# Altium PCB FLATSAT BCR.PcbDoc (part 2 of 3)
Units mm, origin at the board's own origin, x right, y up, seen from the top; angles counter-clockwise.
Board outline 180 x 90 mm, 4 copper layers (Top Layer, Internal Plane 1, Internal Plane 2, Bottom Layer); 220 components, 140 nets, 843 pads, 517 vias.
Unrouted connection lines stored in the file: 2.
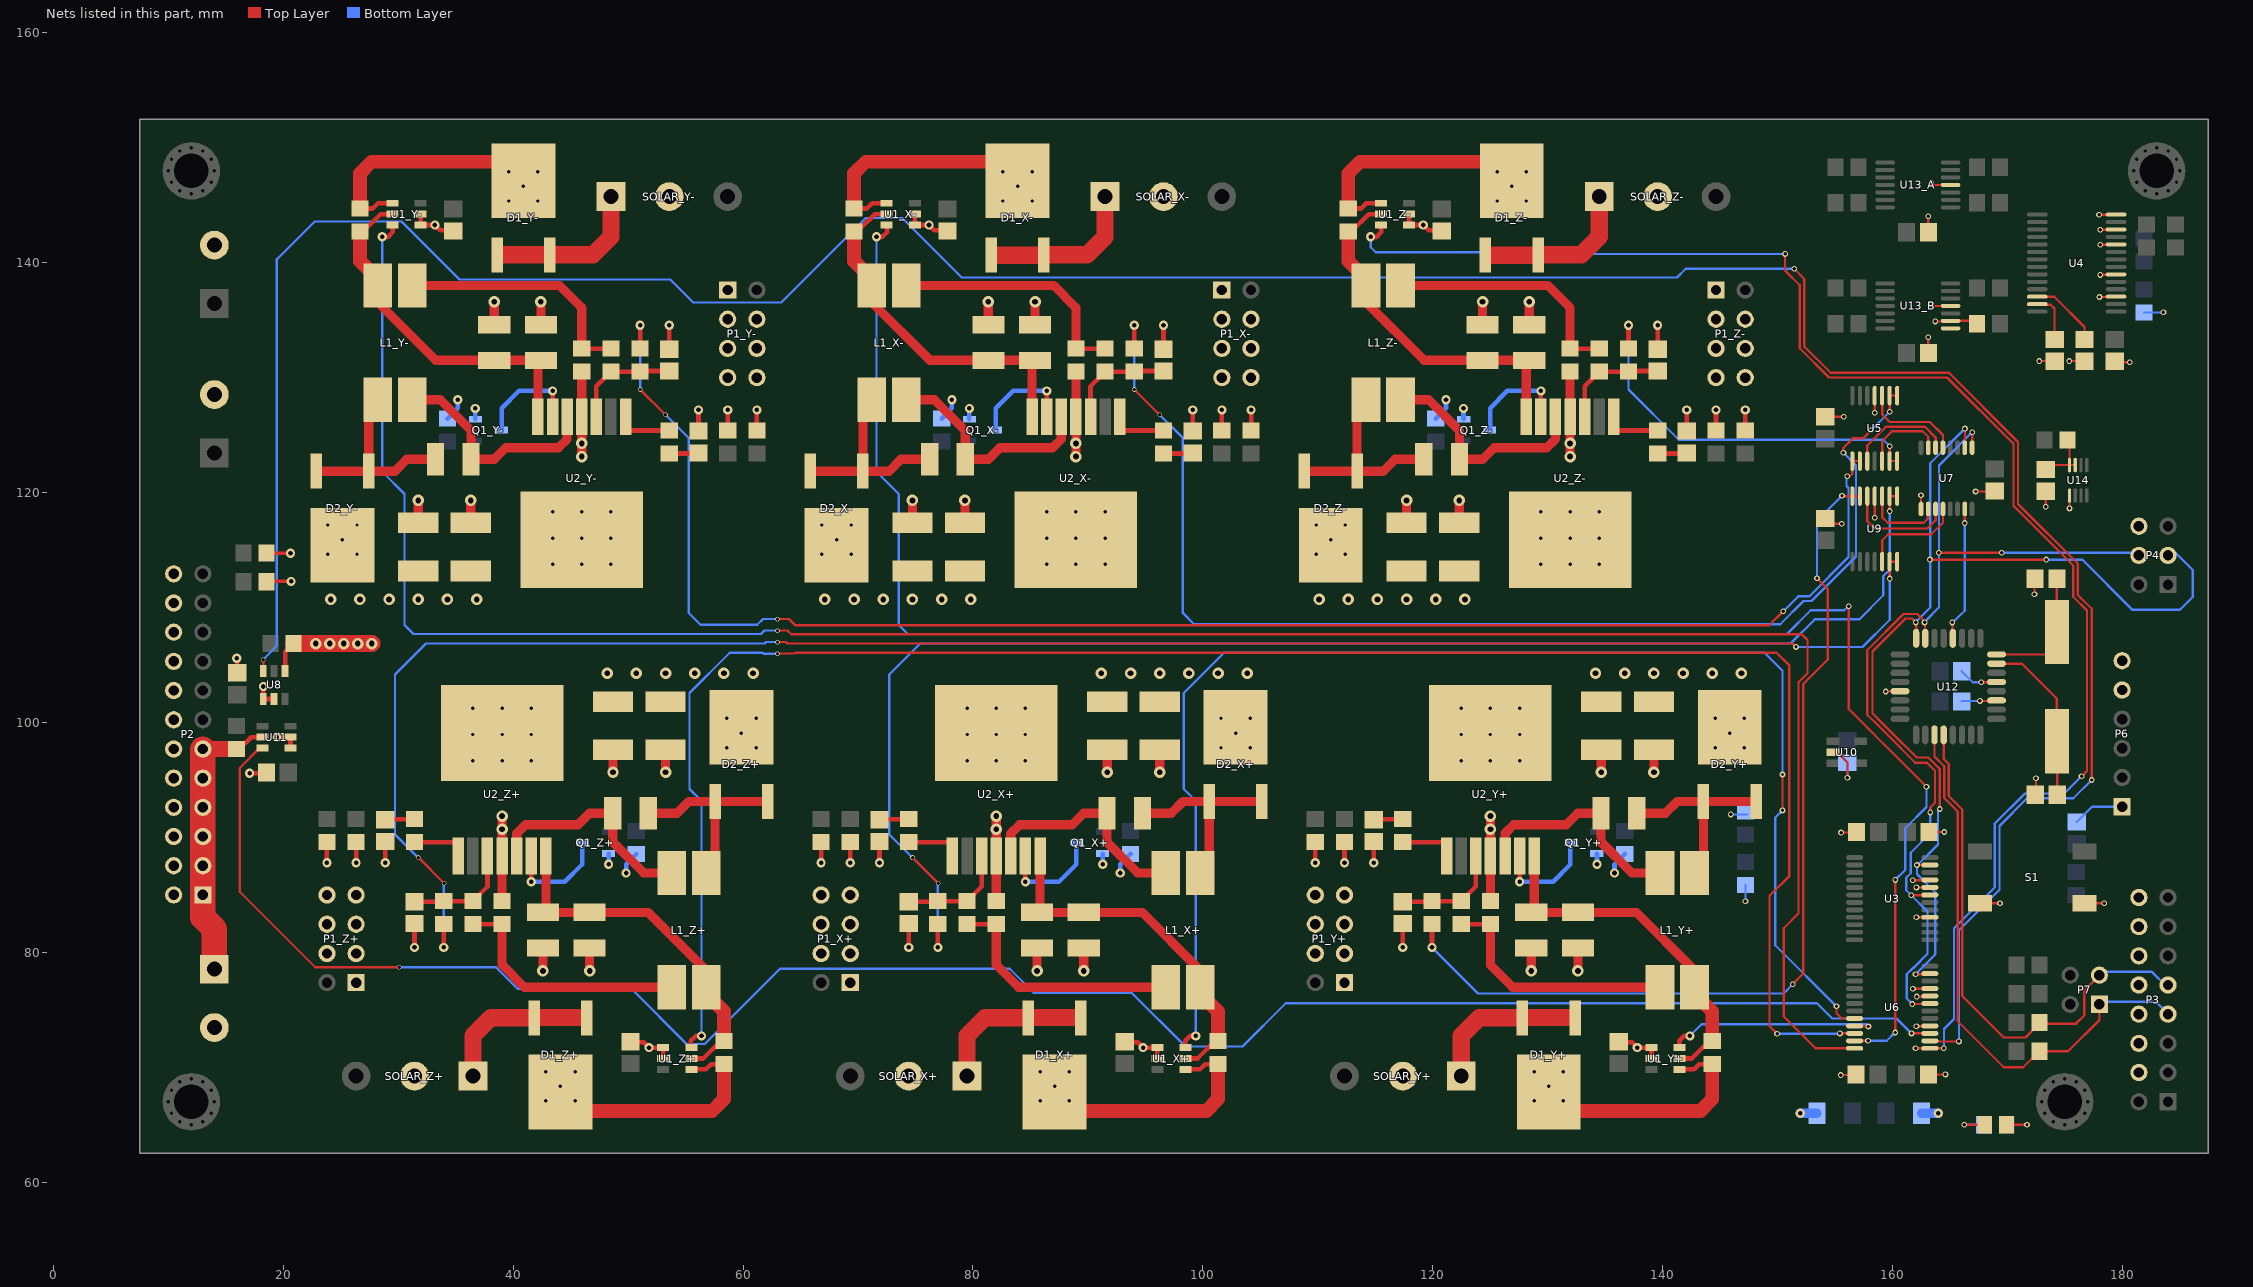
[diagram p4: the nets of this part, all layers, seen from the top]

## Via types
v1: diameter 0.5, hole 0.3, Top Layer to Bottom Layer, tented both sides, 205 vias
v2: diameter 0.5, hole 0.3, Top Layer to Bottom Layer, tented bottom, 114 vias
v3: diameter 0.8, hole 0.4, Top Layer to Bottom Layer, tented both sides, 103 vias
v4: diameter 1, hole 0.5, Top Layer to Bottom Layer, tented both sides, 77 vias
v5: diameter 0.4, hole 0.3, Top Layer to Bottom Layer, tented both sides, 18 vias

## Nets (pads, with @x,y where several pads share a name; then routed paths per layer and width w, separated by ;. In a path a pad name is that pad's centre, name@x,y a point inside that pad or via, vN(x,y) a via of type N, cw(c..) or ccw(c..) an arc to the next point about the centre after c; other vN are vias at no path point) (continued)
BCR_SCL: P3.7 P7.1 R19.2 U12.27 | length 49.5
  Top Layer w0.2: U12.27@163.675,98.925 163.675,97.05 164.525,96.2 164.525,93.434 165.696,92.263 165.696,74.004 169.7,70 171.4,70 R19.2@172.8,71.4 175.3,71.4 178.025,74.125 P7.1@178.025,75.475
  Bottom Layer w0.2: P7.1@178.025,75.475 178.25,75.7 182.945,75.7 P3.7@184.125,74.52
BCR_SDA: P3.9 P7.3 R20.2 U12.28 | length 47.1
  Top Layer w0.2: U12.28@164.475,98.925 164.475,96.834 164.925,96.384 164.925,93.6 166.1,92.425 166.1,76.2 169.7,72.6 171.6,72.6 172.8,73.8 176,73.8 176.7,74.5 176.7,76.69 P7.3@178.025,78.015
  Bottom Layer w0.2: P7.3@178.025,78.015 178.31,78.3 182.6,78.3 183.84,77.06 P3.9@184.125,77.06
DAC_S\S\: U7.7 U12.12 | length 11.8
  Top Layer w0.2: U12.12@165.248,107.35 v1@165.248,108.7 ; U7.7@166.275,118.546 U7.7@166.3,118.571 ; v1(166.3,117.35) U7.7@166.3,118.571 ; U7.7@166.3,118.7 U7.7@166.3,118.571 ; U7.7@166.312,118.583 U7.7@166.3,118.571
  Bottom Layer w0.2: v1@165.248,108.7 166.3,109.725 v1(166.3,117.35)
  other v1: 165.227,108.712
DTR: C24.1 P6.1 | length 4.5
  Bottom Layer w0.2: C24.1@176.05,91.35 177.375,92.675 P6.1@180,92.675
GND: BAT-TEMP.2 BAT.2 C1_X+.2 C1_X-.2 C1_Y+.2 C1_Y-.2 C1_Z+.2 C1_Z-.2 C2_X+.2 C2_X-.2 C2_Y+.2 C2_Y-.2 C2_Z+.2 C2_Z-.2 C4_X+.2 C4_X-.2 C4_Y+.2 C4_Y-.2 C4_Z+.2 C4_Z-.2 C5_X+.2 C5_X-.2 C5_Y+.2 C5_Y-.2 C5_Z+.2 C5_Z-.2 C6_X+.2 C6_X-.2 C6_Y+.2 C6_Y-.2 C6_Z+.2 C6_Z-.2 C7_X+.2 C7_X-.2 C7_Y+.2 C7_Y-.2 C7_Z+.2 C7_Z-.2 C8_X+.1 C8_X-.1 C8_Y+.1 C8_Y-.1 C8_Z+.1 C8_Z-.1 C9.1 C10.1 C11.1 C12.1 C13.2 C14.1 C15.1 C16.1 C17.1 C18.1 C19.2 C20.2 C21.1 C22.1 C23.1 C25.1 C26.2 C27_A.1 C27_B.1 C28.1 C29.1 C30.1 D3.2 LOAD.2 P1_X+.4 P1_X+.6 P1_X+.8 P1_X-.4 P1_X-.6 P1_X-.8 P1_Y+.4 P1_Y+.6 P1_Y+.8 P1_Y-.4 P1_Y-.6 P1_Y-.8 P1_Z+.4 P1_Z+.6 P1_Z+.8 P1_Z-.4 P1_Z-.6 P1_Z-.8 P2.2 P2.4 P2.6 P2.8 P2.10 P2.12 P2.14 P2.16 P2.18 P2.20 P2.22 P2.24 P3.4 P3.6 P3.8 P3.10 P3.12 P3.14 P3.16 P4.6 P6.5 P6.6 Q1_X+.2 Q1_X-.2 Q1_Y+.2 Q1_Y-.2 Q1_Z+.2 Q1_Z-.2 R3_X+.2 R3_X-.2 R3_Y+.2 R3_Y-.2 R3_Z+.2 R3_Z-.2 R6_X+.1 R6_X-.1 R6_Y+.1 R6_Y-.1 R6_Z+.1 R6_Z-.1 R8_X+.2 R8_X-.2 R8_Y+.2 R8_Y-.2 R8_Z+.2 R8_Z-.2 R10.2 R13.2 R17.1 S1.1 SOLAR_X+.2 SOLAR_X-.2 SOLAR_Y+.2 SOLAR_Y-.2 SOLAR_Z+.2 SOLAR_Z-.2 U1_X+.1 U1_X+.2 U1_X-.1 U1_X-.2 U1_Y+.1 U1_Y+.2 U1_Y-.1 U1_Y-.2 U1_Z+.1 U1_Z+.2 U1_Z-.1 U1_Z-.2 U2_X+.4 U2_X-.4 U2_Y+.4 U2_Y-.4 U2_Z+.4 U2_Z-.4 U3.4 U3.8 U3.9 U4.3 U4.6 U4.10 U4.12 U4.14 U5.11 U6.4 U6.8 U6.9 U7.1 U8.1 U8.2 U9.11 U10.2 U11.1 U11.2 U12.3 U12.5 U12.21 U13_A.11 U13_B.11 U14.1 | length 245.2
  Top Layer w0.2: C12.1@154.175,117.75 154.625,117.3 v1(155.6,117.3) ; C18.1@154.175,126.6 v1(155.775,126.6) ; U10.2@154.85,97.425 155.199,97.425 156.1,96.524 v1(156.1,95.2) ; v1(155.525,69.325) C16.1@156.75,69.325 ; v1(155.55,90.425) C11.1@156.775,90.425 ; v1(158.475,117.825) U9.11@158.475,119.7 ; v1@158.475,126.975 U5.11@158.475,128.45 ; v1(159.425,102.7) U12.21@161.15,102.7 ; v1(161.775,86.275) U3.9@163,86.275 ; v1(161.8,76.825) U6.9@163.025,76.825 ; v1(162.1,73.575) U6.4@163.325,73.575 ; v1(162.1,83.05) U3.4@163.325,83.05 ; v1(162.1,85.65) U3.8@163.325,85.65 ; v1(162.125,76.15) U6.8@163.35,76.15 ; U7.1@162.5,118.475 v1(162.5,119.775) ; C27_B.1@163.125,132.175 v1(163.125,133.525) ; C27_A.1@163.125,142.7 v1(163.125,144.05) ; C9.1@163.3,90.475 v1(164.525,90.475) ; C15.1@163.4,69.375 v1(164.625,69.375) ; v1(163.4,136.425) 163.575,136.25 U13_B.11@165.1,136.25 ; v1(163.4,146.95) 163.575,146.775 U13_A.11@165.1,146.775 ; v1(167.25,120.1) C17.1@168.975,120.1 ; v1(167.625,101.875) U12.3@169.35,101.875 ; S1.1@167.65,84.275 v1(169.375,84.275) ; v1(167.75,103.5) U12.5@169.475,103.5 ; D3.2@170,65 v1(171.725,65) ; v1(172.375,111.15) C23.1@172.375,112.5 ; C22.1@172.5,93.8 v1(172.5,95.15) ; v1(172.8,131.45) C13.2@174.15,131.45 ; v1(173.35,118.775) C28.1@173.35,120.125 C28.1@173.725,119.75 ; v1(175.4,131.45) C14.1@176.75,131.45 ; v1(175.425,118.625) U14.1@175.425,119.975 ; S1.1@176.725,84.275 v1(178.45,84.275) ; v1(178,144.175) U4.14@179.35,144.175 ; v1(178.025,137.025) U4.3@179.375,137.025 ; v1(178.1,138.95) U4.6@179.45,138.95 ; v1(178.1,141.575) U4.10@179.45,141.575 ; v1(178.1,142.875) U4.12@179.45,142.875 ; C10.1@179.325,131.35 v1(180.675,131.35)
  Top Layer w0.3: R17.1@18.292,112.275 v3(20.675,112.275)
  Top Layer w0.4: v3@16,105.672 16,104.325 C19.2@16.191,104.325 ; v3(17.066,95.588) C20.2@18.299,95.588 ; U8.1@18.25,102.266 U8.1@18.25,102.05 U8.1@18.263,102.05 ; U8.1@18.263,101.901 U8.1@18.263,102.05 ; v3(18.263,103.134) U8.1@18.263,102.05 ; U8.2@19.2,102.05 U8.1@18.263,102.05 ; v3(19.441,98.713) U11.2@20.625,98.713 ; U11.1@20.625,97.775 U11.2@20.625,98.713 ; U11.2@20.625,98.725 U11.2@20.625,98.713 ; U11.2@20.674,98.713 U11.2@20.625,98.713 ; v3(23.794,87.797) R3_Z+.2@23.794,89.591 ; v3(28.874,87.797) C5_Z+.2@28.874,89.641 ; v3(31.414,80.431) C8_Z+.1@31.414,82.513 ; U1_Y-.2@31.951,144.237 U1_Y-.1@31.951,143.287 v3(33.184,143.287) 33.647,142.824 34.745,142.824 C4_Y-.2@34.79,142.779 ; C4_Z+.2@50.21,72.221 50.255,72.176 51.353,72.176 v3(51.816,71.713) U1_Z+.1@53.049,71.713 U1_Z+.2@53.049,70.763 ; C8_Y-.1@53.586,132.487 v3(53.586,134.569) ; C5_Y-.2@56.126,125.359 v3(56.126,127.203) ; R3_Y-.2@61.206,125.409 v3(61.206,127.203) ; v3(66.794,87.797) R3_X+.2@66.794,89.591 ; v3(71.874,87.797) C5_X+.2@71.874,89.641 ; v3(74.414,80.431) C8_X+.1@74.414,82.513 ; U1_X-.2@74.951,144.237 U1_X-.1@74.951,143.287 v3(76.184,143.287) 76.647,142.824 77.745,142.824 C4_X-.2@77.79,142.779 ; C4_X+.2@93.21,72.221 93.255,72.176 94.353,72.176 v3(94.816,71.713) U1_X+.1@96.049,71.713 U1_X+.2@96.049,70.763 ; C8_X-.1@96.586,132.487 v3(96.586,134.569) ; C5_X-.2@99.126,125.359 v3(99.126,127.203) ; R3_X-.2@104.206,125.409 v3(104.206,127.203) ; v3(109.794,87.797) R3_Y+.2@109.794,89.591 ; v3(114.874,87.797) C5_Y+.2@114.874,89.641 ; v3(117.414,80.431) C8_Y+.1@117.414,82.513 ; U1_Z-.2@117.951,144.237 U1_Z-.1@117.951,143.287 v3(119.184,143.287) 119.647,142.824 120.745,142.824 C4_Z-.2@120.79,142.779 ; C4_Y+.2@136.21,72.221 136.255,72.176 137.353,72.176 v3(137.816,71.713) U1_Y+.1@139.049,71.713 U1_Y+.2@139.049,70.763 ; C8_Z-.1@139.586,132.487 v3(139.586,134.569) ; C5_Z-.2@142.126,125.359 v3(142.126,127.203) ; R3_Z-.2@147.206,125.409 v3(147.206,127.203)
  Top Layer w0.8: C7_Y-.2@31.742,117.381 v4(31.742,119.329) ; C6_Y-.2@36.314,117.381 v4(36.314,119.329) ; C2_Y-.2@38.346,134.669 v4(38.346,136.617) ; R6_Z+.1@39.034,84.463 v4@39.034,91.734 ; C1_Y-.2@42.41,134.669 v4(42.41,136.617) ; v4(42.59,78.383) C1_Z+.2@42.59,80.331 ; v4@45.966,123.266 R6_Y-.1@45.966,130.537 ; v4(46.654,78.383) C2_Z+.2@46.654,80.331 ; v4(48.686,95.671) C6_Z+.2@48.686,97.619 ; v4(53.258,95.671) C7_Z+.2@53.258,97.619 ; C7_X-.2@74.742,117.381 v4(74.742,119.329) ; C6_X-.2@79.314,117.381 v4(79.314,119.329) ; C2_X-.2@81.346,134.669 v4(81.346,136.617) ; R6_X+.1@82.034,84.463 v4@82.034,91.734 ; C1_X-.2@85.41,134.669 v4(85.41,136.617) ; v4(85.59,78.383) C1_X+.2@85.59,80.331 ; v4@88.966,123.266 R6_X-.1@88.966,130.537 ; v4(89.654,78.383) C2_X+.2@89.654,80.331 ; v4(91.686,95.671) C6_X+.2@91.686,97.619 ; v4(96.258,95.671) C7_X+.2@96.258,97.619 ; C7_Z-.2@117.742,117.381 v4(117.742,119.329) ; C6_Z-.2@122.314,117.381 v4(122.314,119.329) ; C2_Z-.2@124.346,134.669 v4(124.346,136.617) ; R6_Y+.1@125.034,84.463 v4@125.034,91.734 ; C1_Z-.2@128.41,134.669 v4(128.41,136.617) ; v4(128.59,78.383) C1_Y+.2@128.59,80.331 ; v4@131.966,123.266 R6_Z-.1@131.966,130.537 ; v4(132.654,78.383) C2_Y+.2@132.654,80.331 ; v4(134.686,95.671) C6_Y+.2@134.686,97.619 ; v4(139.258,95.671) C7_Y+.2@139.258,97.619
  Bottom Layer w0.2: v1(147.225,84.45) R13.2@147.225,85.875 ; v1(156.1,95.2) C21.1@156.1,96.525 ; C26.2@166.05,101.825 166.1,101.875 v1(167.625,101.875) ; C25.1@166.05,104.45 167,103.5 v1(167.75,103.5) ; R10.2@181.9,135.675 183.575,135.675 v1(183.6,135.7)
  Bottom Layer w0.4: R8_Y-.2@34.282,126.441 35.171,127.33 v3(35.171,128.092) ; Q1_Y-.2@36.695,126.409 v3(36.695,127.33) ; v3(48.305,87.67) Q1_Z+.2@48.305,88.591 ; v3(49.829,86.908) 49.829,87.67 R8_Z+.2@50.718,88.559 ; R8_X-.2@77.282,126.441 78.171,127.33 v3(78.171,128.092) ; Q1_X-.2@79.695,126.409 v3(79.695,127.33) ; v3(91.305,87.67) Q1_X+.2@91.305,88.591 ; v3(92.829,86.908) 92.829,87.67 R8_X+.2@93.718,88.559 ; R8_Z-.2@120.282,126.441 121.171,127.33 v3(121.171,128.092) ; Q1_Z-.2@122.695,126.409 v3(122.695,127.33) ; v3(134.305,87.67) Q1_Y+.2@134.305,88.591 ; v3(135.829,86.908) 135.829,87.67 R8_Y+.2@136.718,88.559
  Bottom Layer w0.8: v3(152,66) C30.1@153.45,66 ; C29.1@162.55,66 v3(164,66)
  other v1: 158.475,126.95
  other v2: 36.494,96.671 39.034,96.671 41.574,96.671 79.494,96.671 82.034,96.671 84.574,96.671 122.494,96.671 125.034,96.671 127.574,96.671 36.494,98.957 39.034,98.957 41.574,98.957 79.494,98.957 82.034,98.957 84.574,98.957 122.494,98.957 125.034,98.957 127.574,98.957 36.494,101.243 39.034,101.243 41.574,101.243 79.494,101.243 82.034,101.243 84.574,101.243 122.494,101.243 125.034,101.243 127.574,101.243 43.426,113.757 45.966,113.757 48.506,113.757 86.426,113.757 88.966,113.757 91.506,113.757 129.426,113.757 131.966,113.757 134.506,113.757 43.426,116.043 45.966,116.043 48.506,116.043 86.426,116.043 88.966,116.043 91.506,116.043 129.426,116.043 131.966,116.043 134.506,116.043 43.426,118.329 45.966,118.329 48.506,118.329 86.426,118.329 88.966,118.329 91.506,118.329 129.426,118.329 131.966,118.329 134.506,118.329
  other v3: 15.95,105.6
  other v4: 39.034,90.718 82.034,90.718 125.034,90.718 39.034,91.861 82.034,91.861 125.034,91.861 45.966,123.139 88.966,123.139 131.966,123.139 45.966,124.282 88.966,124.282 131.966,124.282
I_SET_CV_X+: R7_X+.2 U9.8 U9.9 | length 126.5
  Top Layer w0.2: v5(74.75,88.25) v5(77,86) ; v1(159.775,118.4) U9.9@159.775,119.7 U9.8@160.425,119.7
  Top Layer w0.4: v3(76.954,80.431) R7_X+.2@76.954,82.463
  Bottom Layer w0.2: v5(74.75,88.25) 74.725,88.25 72.725,90.25 72.725,104.175 75.425,106.875 151.147,106.875 153.247,108.975 157.125,108.975 159.225,111.075 159.225,112.753 159.547,113.075 159.6,113.075 159.775,113.25 v1(159.775,118.4) ; v3(76.954,80.431) v5@76.954,86.021
I_SET_CV_X-: R7_X-.2 U5.8 U5.9 | length 107.8
  Top Layer w0.2: v5(94.046,128.979) v5(96.25,126.775) ; v1@155.737,123.488 155.737,123.887 156.575,124.725 157.45,124.725 v1(158.15,125.425) ; v1(159.775,127.05) U5.9@159.775,128.45 U5.8@160.425,128.45
  Top Layer w0.4: R7_X-.2@94.046,132.537 v3(94.046,134.569)
  Bottom Layer w0.2: v5(94.046,128.979) v3(94.046,134.569) ; v5(96.25,126.775) 98.275,124.75 98.275,109.525 99.25,108.55 150.259,108.55 152.284,110.575 152.975,110.575 156.85,114.45 156.85,122.375 v1(155.75,123.475) ; v1@155.65,123.375 v1@155.875,123.375 ; v1(158.15,125.425) v1(159.775,127.05)
I_SET_CV_Y+: R7_Y+.2 U9.13 U9.14 | length 82
  Top Layer w0.2: v1@151.337,77.237 152.25,78.15 152.25,103.347 154.4,105.497 154.4,111.6 v1(153.45,112.55) ; v1(155.625,119.725) 155.65,119.7 U9.14@156.525,119.7 U9.13@157.175,119.7
  Top Layer w0.4: v3(119.954,80.431) R7_Y+.2@119.954,82.463
  Bottom Layer w0.2: v3(119.954,80.431) 123.96,76.425 150.55,76.425 v1(151.35,77.225) ; v1(153.45,112.55) 153.45,117.55 v1(155.625,119.725)
I_SET_CV_Y-: R7_Y-.2 U5.1 U5.2 | length 142.4
  Top Layer w0.2: v5(51.046,128.979) v5(53.25,126.775) ; v5(63,109) 64.009,109 64.534,108.475 149.3,108.475 v1@150.487,109.662 ; v1(156.075,121.425) 156.3,121.425 156.525,121.65 U5.1@156.525,122.75 U5.2@157.175,122.75
  Top Layer w0.4: R7_Y-.2@51.046,132.537 v3(51.046,134.569)
  Bottom Layer w0.2: v5(51.046,128.979) v3(51.046,134.569) ; v5(53.25,126.775) 55.275,124.75 55.275,109.525 56.3,108.5 61.241,108.5 61.741,109 v5(63,109) ; v1(150.525,109.675) 151.825,110.975 152.775,110.975 156.2,114.4 156.2,120.4 156.025,120.575 156.025,121.375 v1(156.075,121.425)
I_SET_CV_Z+: R7_Z+.2 U9.6 U9.7 | length 165.5
  Top Layer w0.2: v5(31.75,88.25) v5(34,86) ; v5(63,107) 63.747,107 63.872,106.875 151.325,106.875 v1(151.625,106.575) ; v1(159.775,112.525) U9.6@159.775,113.875 ; U9.6@159.775,114 U9.7@160.425,114
  Top Layer w0.4: v3(33.954,80.431) R7_Z+.2@33.954,82.463
  Bottom Layer w0.2: v5(31.75,88.25) 31.725,88.25 29.725,90.25 29.725,104.175 32.425,106.875 61.878,106.875 62.003,107 v5(63,107) ; v3(33.954,80.431) v5@33.954,86.021 ; v1(151.625,106.575) 157.4,106.575 159.775,108.95 v1(159.775,112.525)
I_SET_CV_Z-: R7_Z-.2 U5.6 U5.7 | length 34.3
  Top Layer w0.2: v1(159.775,124.05) U5.6@159.775,122.75 U5.7@160.425,122.75
  Top Layer w0.4: R7_Z-.2@137.046,132.537 v3(137.046,134.569)
  Bottom Layer w0.2: v3(137.046,134.569) 137.046,128.979 141.425,124.6 159.225,124.6 v1(159.775,124.05)
I_SET_X+: U7.2 U9.10 | length 7
  Top Layer w0.2: U9.10@159.125,119.7 159.125,117.85 159.6,117.375 162.75,117.375 163.1,117.725 163.1,118.546 U7.2@163.137,118.583
I_SET_X-: U5.10 U7.13 | length 8.8
  Top Layer w0.2: U5.10@159.125,128.45 159.125,126.8 159.775,126.15 163.265,126.15 164.407,125.008 U7.13@164.407,123.917
I_SET_Y+: U7.3 U9.12 | length 9.7
  Top Layer w0.2: U9.12@157.825,119.7 157.825,117.525 158.475,116.875 163.05,116.875 163.772,117.597 U7.3@163.772,118.583
I_SET_Y-: U5.3 U7.14 | length 9.3
  Top Layer w0.2: U5.3@157.825,122.75 157.825,124.1 159.475,125.75 159.605,125.75 159.608,125.747 162.828,125.747 163.772,124.803 U7.14@163.772,123.917
I_SET_Z+: U7.4 U9.5 | length 9
  Top Layer w0.2: U9.5@159.125,114 159.125,115.85 159.65,116.375 163.4,116.375 164.407,117.383 U7.4@164.407,118.583
I_SET_Z-: U5.5 U7.15 | length 7.3
  Top Layer w0.2: U5.5@159.125,122.75 159.125,124.5 159.969,125.344 162.656,125.344 163.137,124.863 U7.15@163.137,123.917
ISENSE_BCR: U6.2 U8.6 | length 271.2
  Top Layer w0.2: U8.6@18.25,104.5 v5(18.25,105.475) ; v1(151.475,139.475) 152.35,138.6 152.35,132.725 154.65,130.425 164.941,130.425 170.95,124.416 170.95,119.025 176.15,113.825 176.15,111.103 177.35,109.903 v1(177.35,95) ; U6.2@163.8,72.25 v1(165.8,72.25)
  Bottom Layer w0.2: v5(18.25,105.475) 19.425,106.65 19.425,140.3 22.725,143.6 30.275,143.6 35.325,138.55 53.675,138.55 55.675,136.55 63.325,136.55 70.675,143.9 73.85,143.9 79.025,138.725 141.275,138.725 142.025,139.475 v1@151.425,139.475 ; v1(165.8,72.25) 165.8,81.925 169.325,85.45 169.325,91 171.725,93.4 175.75,93.4 v1(177.35,95)
ISENSE_LOAD: U6.3 U11.6 | length 173.9
  Top Layer w0.2: U11.6@17.925,97.775 16.2,96.05 16.2,85.275 22.775,78.7 v5(30.075,78.7) ; v1(161.675,72.95) U6.3@162.9,72.95
  Top Layer w0.4: U11.6@17.925,97.775 U11.6@18.175,97.775
  Bottom Layer w0.2: v5(30.075,78.7) 38.5,78.7 40.375,76.825 50.3,76.825 55.175,71.95 55.254,72.029 56.678,72.029 63.224,78.575 83.2,78.575 85.3,76.475 93.825,76.475 98.5,71.8 103.45,71.8 107.225,75.575 153.45,75.575 154.775,74.25 160.375,74.25 v1(161.675,72.95)
ISENSE_X+: U1_X+.6 U6.20 | length 120.1
  Top Layer w0.2: v1(150.45,92.35) v1(150.45,95.475) ; v1(155.15,75.3) 155.15,74.7 155.6,74.25 U6.20@156.725,74.25
  Top Layer w0.4: U1_X+.6@98.499,71.84 98.467,72.316 98.912,72.761 v3(99.388,72.729)
  Bottom Layer w0.2: v3(99.388,72.729) 99.388,93.187 98.35,94.225 98.35,102.575 101.85,106.075 148.875,106.075 150.45,104.5 v1(150.45,95.475) ; v1(150.45,92.35) 149.825,91.725 149.825,80.625 v1(155.15,75.3)
ISENSE_X-: U1_X-.6 U6.23 | length 165.2
  Top Layer w0.2: v1@156.167,110.117 v1(156.208,110.117) ; v1@156.225,110.117 156.225,101.153 157.95,99.428 157.95,99.424 159.224,98.15 159.228,98.15 v1@162.976,94.401 ; U6.23@156.55,72.3 v1(157.9,72.3) ; v1(160.25,73.025) v1(160.25,86.3)
  Top Layer w0.4: v3(71.612,142.271) 72.088,142.239 72.533,142.684 U1_X-.6@72.501,143.16
  Bottom Layer w0.2: v3(71.612,142.271) 71.612,121.813 73.55,119.875 73.55,108.475 74.325,107.7 150.841,107.7 152.916,109.775 155.825,109.775 156.167,110.117 v1(156.208,110.117) ; v1(157.9,72.3) 159.525,72.3 v1(160.25,73.025) ; v1(160.25,86.3) 161.125,87.175 161.125,90.8 162.975,92.65 v1(162.975,94.4)
ISENSE_Y+: U1_Y+.6 U6.21 | length 18.8
  Top Layer w0.2: U6.21@156.7,73.55 v1(157.925,73.55)
  Top Layer w0.4: U1_Y+.6@141.499,71.84 141.467,72.316 141.912,72.761 v3(142.388,72.729)
  Bottom Layer w0.2: v3(142.388,72.729) 143.4,73.741 157.734,73.741 v1(157.925,73.55)
ISENSE_Y-: U1_Y-.6 U6.24 | length 200
  Top Layer w0.2: v5(63,108) 63.878,108 64.203,107.675 152.097,107.675 152.247,107.525 152.268,107.525 152.625,107.168 152.625,104.288 151.85,103.513 151.85,83.4 150.55,82.1 150.55,74.425 153.325,71.65 U6.24@156.725,71.65
  Top Layer w0.4: v3(28.612,142.271) 29.088,142.239 29.533,142.684 U1_Y-.6@29.501,143.16
  Bottom Layer w0.2: v3(28.612,142.271) 28.612,121.813 30.55,119.875 30.55,108.475 31.325,107.7 61.572,107.7 61.872,108 v5(63,108)
ISENSE_Z+: U1_Z+.6 U6.22 | length 169.4
  Top Layer w0.2: v5(63,106) 64.5,106 64.575,106.075 149.925,106.075 151.05,104.95 151.05,86.65 149.325,84.925 149.325,73.575 v1@149.962,72.937 ; v1(155.45,72.95) U6.22@156.8,72.95
  Top Layer w0.4: U1_Z+.6@55.499,71.84 55.467,72.316 55.912,72.761 v3(56.388,72.729)
  Bottom Layer w0.2: v3(56.388,72.729) 56.388,93.187 55.35,94.225 55.35,102.575 58.85,106.075 61.675,106.075 61.775,105.975 62.975,105.975 v5(63,106) ; v1(149.975,72.925) 155.425,72.925 v1(155.45,72.95)
ISENSE_Z-: U1_Z-.6 U6.1 | length 134.3
  Top Layer w0.2: v1(150.675,140.775) 150.675,139.325 151.95,138.05 151.95,132.559 154.484,130.025 164.775,130.025 170.55,124.25 170.55,118.859 175.75,113.659 175.75,110.937 176.95,109.737 176.95,95.775 v1@176.5,95.325 ; v1(162.025,71.65) 163.25,71.65 v1(164.475,71.65)
  Top Layer w0.4: v3(114.612,142.271) 115.088,142.239 115.533,142.684 U1_Z-.6@115.501,143.16
  Bottom Layer w0.2: v3(114.612,142.271) 114.612,141.363 115.05,140.925 131.725,140.925 131.875,140.775 v1(150.675,140.775) ; v1@164.5,71.75 164.5,73.325 165.375,74.2 165.375,82.101 168.925,85.651 168.925,91.201 171.549,93.825 174.975,93.825 v1(176.475,95.325)
LOAD: LOAD.1 P2.1 P2.3 P2.5 P2.7 P2.9 P2.11 R18.1 U11.5 | length 25.3
  Top Layer w0.4: R18.1@15.925,97.7 16.175,97.7 17.2,98.725 U11.5@18.275,98.725
  Top Layer w1.4: P2.11@13,97.7 R18.1@15.925,97.7
  Top Layer w2.2: P2.11@13,97.7 P2.9@13,95.16 P2.7@13,92.62 P2.5@13,90.08 P2.3@13,87.54 P2.1@13,85 13,83.025 14,82.025 LOAD.1@14,78.54
MISO: P4.3 U3.11 U6.11 U7.10 U12.16 | length 92.5
  Top Layer w0.2: v1(162.025,78.1) U6.11@163.25,78.1 ; U12.16@162.075,107.05 162.075,108.7 161.725,109.05 161.15,109.05 158.275,106.175 158.275,100.8 159.15,99.925 159.15,99.921 159.721,99.35 159.725,99.35 162.125,96.95 163.141,96.95 164.125,95.966 v1(164.125,92.475) ; v1(162.15,87.6) U3.11@163.375,87.6 ; v1(163.275,114.175) v1@173.375,114.175 ; U7.10@166.325,123.85 v1(166.325,125.575)
  Bottom Layer w0.2: v1(162.025,78.1) 163.75,79.825 163.75,85.225 162.15,86.825 v1(162.15,87.6) 162.175,87.575 163.975,89.375 163.975,92.325 v1(164.125,92.475) ; v1@162.075,108.775 163.3,110 163.3,122.55 v1(166.325,125.575) ; v1(173.4,114.175) 176.525,114.175 180.9,109.8 185.025,109.8 186.15,110.925 186.15,113.265 P4.3@184.65,114.765
  other v1: 162.052,108.712
MOSI: P4.4 U3.7 U6.7 U7.9 U12.15 | length 84.7
  Top Layer w0.2: v1(161.65,84.975) U3.7@162.875,84.975 ; v1(161.75,75.5) U6.7@162.975,75.5 ; U12.15@162.85,107.075 162.85,108.8 162.828,108.8 162.178,109.45 160.984,109.45 157.825,106.291 157.825,100.684 158.75,99.759 158.75,99.755 159.555,98.95 159.559,98.95 162.009,96.5 163.025,96.5 163.725,95.8 163.725,93.025 163.3,92.6 v1(163.3,92.175) ; v1(164.05,114.775) v1(169.525,114.775) ; U7.9@166.95,123.525 v1(166.95,125.25)
  Bottom Layer w0.2: v1(161.75,75.5) 161.25,76 161.25,78.103 161.797,78.65 161.85,78.65 163.075,79.875 163.075,83.55 v1(161.65,84.975) 161.225,85.4 161.225,86.503 161.6,86.878 161.6,88.675 163.3,90.375 v1(163.3,92.175) ; v1@162.85,108.8 164.075,110.025 164.075,122.375 v1(166.95,125.25) ; v1@169.525,114.765 P4.4@181.46,114.765
  other v1: 162.814,108.712
NetC1_X+_1: C1_X+.1 C2_X+.1 L1_X+.2 R1_X+.1 U1_X+.5 U2_X+.7 | length 31.6
  Top Layer w0.4: U1_X+.5@98.499,70.763 99.544,70.763 101.052,72.271 R1_X+.1@101.338,72.271
  Top Layer w0.8: U2_X+.7@85.844,88.389 85.844,83.743 C1_X+.1@85.59,83.489 85.6,83.479 94.734,83.479 99.79,78.423 L1_X+.2@99.79,76.964 L1_X+.2@99.79,76.391
  Top Layer w1.2: L1_X+.2@99.79,76.391 101.338,74.843 R1_X+.1@101.338,72.271
NetC1_X-_1: C1_X-.1 C2_X-.1 L1_X-.2 R1_X-.1 U1_X-.5 U2_X-.7 | length 31.6
  Top Layer w0.4: R1_X-.1@69.662,142.729 69.948,142.729 71.456,144.237 U1_X-.5@72.501,144.237
  Top Layer w0.8: L1_X-.2@71.21,138.609 L1_X-.2@71.21,138.036 71.21,136.577 76.266,131.521 85.4,131.521 C1_X-.1@85.41,131.511 85.156,131.257 U2_X-.7@85.156,126.611
  Top Layer w1.2: R1_X-.1@69.662,142.729 69.662,140.157 L1_X-.2@71.21,138.609
NetC1_Y+_1: C1_Y+.1 C2_Y+.1 L1_Y+.2 R1_Y+.1 U1_Y+.5 U2_Y+.7 | length 31.6
  Top Layer w0.4: U1_Y+.5@141.499,70.763 142.544,70.763 144.052,72.271 R1_Y+.1@144.338,72.271
  Top Layer w0.8: U2_Y+.7@128.844,88.389 128.844,83.743 C1_Y+.1@128.59,83.489 128.6,83.479 137.734,83.479 142.79,78.423 L1_Y+.2@142.79,76.964 L1_Y+.2@142.79,76.391
  Top Layer w1.2: L1_Y+.2@142.79,76.391 144.338,74.843 R1_Y+.1@144.338,72.271
NetC1_Y-_1: C1_Y-.1 C2_Y-.1 L1_Y-.2 R1_Y-.1 U1_Y-.5 U2_Y-.7 | length 31.6
  Top Layer w0.4: R1_Y-.1@26.662,142.729 26.948,142.729 28.456,144.237 U1_Y-.5@29.501,144.237
  Top Layer w0.8: L1_Y-.2@28.21,138.609 L1_Y-.2@28.21,138.036 28.21,136.577 33.266,131.521 42.4,131.521 C1_Y-.1@42.41,131.511 42.156,131.257 U2_Y-.7@42.156,126.611
  Top Layer w1.2: R1_Y-.1@26.662,142.729 26.662,140.157 L1_Y-.2@28.21,138.609
NetC1_Z+_1: C1_Z+.1 C2_Z+.1 L1_Z+.2 R1_Z+.1 U1_Z+.5 U2_Z+.7 | length 31.6
  Top Layer w0.4: U1_Z+.5@55.499,70.763 56.544,70.763 58.052,72.271 R1_Z+.1@58.338,72.271
  Top Layer w0.8: U2_Z+.7@42.844,88.389 42.844,83.743 C1_Z+.1@42.59,83.489 42.6,83.479 51.734,83.479 56.79,78.423 L1_Z+.2@56.79,76.964 L1_Z+.2@56.79,76.391
  Top Layer w1.2: L1_Z+.2@56.79,76.391 58.338,74.843 R1_Z+.1@58.338,72.271
NetC1_Z-_1: C1_Z-.1 C2_Z-.1 L1_Z-.2 R1_Z-.1 U1_Z-.5 U2_Z-.7 | length 31.6
  Top Layer w0.4: R1_Z-.1@112.662,142.729 112.948,142.729 114.456,144.237 U1_Z-.5@115.501,144.237
  Top Layer w0.8: L1_Z-.2@114.21,138.609 L1_Z-.2@114.21,138.036 114.21,136.577 119.266,131.521 128.4,131.521 C1_Z-.1@128.41,131.511 128.156,131.257 U2_Z-.7@128.156,126.611
  Top Layer w1.2: R1_Z-.1@112.662,142.729 112.662,140.157 L1_Z-.2@114.21,138.609
NetC3_X+_1: C3_X+.1 D2_X+.1 L1_X+.3 | length 17.4
  Top Layer w0.8: C3_X+.1@94.76,92.099 97.258,92.099 98.288,93.129 D2_X+.1@100.572,93.129 ; L1_X+.3@99.79,86.914 100.572,87.696 D2_X+.1@100.572,93.129 ; D2_X+.1@105.152,93.129 D2_X+.1@100.572,93.129
NetC3_X+_2: C3_X+.2 L1_X+.4 U2_X+.5 | length 19.8
  Top Layer w0.8: U2_X+.5@83.304,88.389 83.304,90.337 84.066,91.099 88.638,91.099 89.638,92.099 C3_X+.2@91.66,92.099 91.66,89.601 94.347,86.914 L1_X+.4@96.79,86.914
NetC3_X-_1: C3_X-.1 D2_X-.1 L1_X-.3 | length 17.4
  Top Layer w0.8: D2_X-.1@65.848,121.871 D2_X-.1@70.428,121.871 ; L1_X-.3@71.21,128.086 70.428,127.304 D2_X-.1@70.428,121.871 ; C3_X-.1@76.24,122.901 73.742,122.901 72.712,121.871 D2_X-.1@70.428,121.871
NetC3_X-_2: C3_X-.2 L1_X-.4 U2_X-.5 | length 19.8
  Top Layer w0.8: L1_X-.4@74.21,128.086 76.653,128.086 79.34,125.399 C3_X-.2@79.34,122.901 81.362,122.901 82.362,123.901 86.934,123.901 87.696,124.663 U2_X-.5@87.696,126.611
NetC3_Y+_1: C3_Y+.1 D2_Y+.1 L1_Y+.3 | length 17.4
  Top Layer w0.8: C3_Y+.1@137.76,92.099 140.258,92.099 141.288,93.129 D2_Y+.1@143.572,93.129 ; L1_Y+.3@142.79,86.914 143.572,87.696 D2_Y+.1@143.572,93.129 ; D2_Y+.1@148.152,93.129 D2_Y+.1@143.572,93.129
NetC3_Y+_2: C3_Y+.2 L1_Y+.4 U2_Y+.5 | length 19.8
  Top Layer w0.8: U2_Y+.5@126.304,88.389 126.304,90.337 127.066,91.099 131.638,91.099 132.638,92.099 C3_Y+.2@134.66,92.099 134.66,89.601 137.347,86.914 L1_Y+.4@139.79,86.914
NetC3_Y-_1: C3_Y-.1 D2_Y-.1 L1_Y-.3 | length 17.4
  Top Layer w0.8: D2_Y-.1@22.848,121.871 D2_Y-.1@27.428,121.871 ; L1_Y-.3@28.21,128.086 27.428,127.304 D2_Y-.1@27.428,121.871 ; C3_Y-.1@33.24,122.901 30.742,122.901 29.712,121.871 D2_Y-.1@27.428,121.871
NetC3_Y-_2: C3_Y-.2 L1_Y-.4 U2_Y-.5 | length 19.8
  Top Layer w0.8: L1_Y-.4@31.21,128.086 33.653,128.086 36.34,125.399 C3_Y-.2@36.34,122.901 38.362,122.901 39.362,123.901 43.934,123.901 44.696,124.663 U2_Y-.5@44.696,126.611
NetC3_Z+_1: C3_Z+.1 D2_Z+.1 L1_Z+.3 | length 17.4
  Top Layer w0.8: C3_Z+.1@51.76,92.099 54.258,92.099 55.288,93.129 D2_Z+.1@57.572,93.129 ; L1_Z+.3@56.79,86.914 57.572,87.696 D2_Z+.1@57.572,93.129 ; D2_Z+.1@62.152,93.129 D2_Z+.1@57.572,93.129
NetC3_Z+_2: C3_Z+.2 L1_Z+.4 U2_Z+.5 | length 19.8
  Top Layer w0.8: U2_Z+.5@40.304,88.389 40.304,90.337 41.066,91.099 45.638,91.099 46.638,92.099 C3_Z+.2@48.66,92.099 48.66,89.601 51.347,86.914 L1_Z+.4@53.79,86.914
NetC3_Z-_1: C3_Z-.1 D2_Z-.1 L1_Z-.3 | length 17.4
  Top Layer w0.8: D2_Z-.1@108.848,121.871 D2_Z-.1@113.428,121.871 ; L1_Z-.3@114.21,128.086 113.428,127.304 D2_Z-.1@113.428,121.871 ; C3_Z-.1@119.24,122.901 116.742,122.901 115.712,121.871 D2_Z-.1@113.428,121.871
NetC3_Z-_2: C3_Z-.2 L1_Z-.4 U2_Z-.5 | length 19.8
  Top Layer w0.8: L1_Z-.4@117.21,128.086 119.653,128.086 122.34,125.399 C3_Z-.2@122.34,122.901 124.362,122.901 125.362,123.901 129.934,123.901 130.696,124.663 U2_Z-.5@130.696,126.611
NetC5_X+_1: C5_X+.1 R4_X+.2 | length 2.6
  Top Layer w0.4: C5_X+.1@71.874,91.541 71.924,91.591 R4_X+.2@74.414,91.591
NetC5_X-_1: C5_X-.1 R4_X-.2 | length 2.6
  Top Layer w0.4: R4_X-.2@96.586,123.409 99.076,123.409 C5_X-.1@99.126,123.459
NetC5_Y+_1: C5_Y+.1 R4_Y+.2 | length 2.6
  Top Layer w0.4: C5_Y+.1@114.874,91.541 114.924,91.591 R4_Y+.2@117.414,91.591
NetC5_Y-_1: C5_Y-.1 R4_Y-.2 | length 2.6
  Top Layer w0.4: R4_Y-.2@53.586,123.409 56.076,123.409 C5_Y-.1@56.126,123.459
NetC5_Z+_1: C5_Z+.1 R4_Z+.2 | length 2.6
  Top Layer w0.4: C5_Z+.1@28.874,91.541 28.924,91.591 R4_Z+.2@31.414,91.591
NetC5_Z-_1: C5_Z-.1 R4_Z-.2 | length 2.6
  Top Layer w0.4: R4_Z-.2@139.586,123.409 142.076,123.409 C5_Z-.1@142.126,123.459
NetC6_X+_1: C6_X+.1 C6_X-.1 C6_Y+.1 C6_Y-.1 C6_Z+.1 C6_Z-.1 C7_X+.1 C7_X-.1 C7_Y+.1 C7_Y-.1 C7_Z+.1 C7_Z-.1 D2_X+.2 D2_X-.2 D2_Y+.2 D2_Y-.2 D2_Z+.2 D2_Z-.2 R11.1 R12.1 R16.2 U8.4 | length 13.5
  Top Layer w0.3: R16.2@18.242,114.725 v3(20.625,114.725)
  Top Layer w0.4: U8.4@20.175,104.275 20.175,106.15 R11.1@20.9,106.875
  Top Layer w1.5: R11.1@20.9,106.875 v4(27.686,106.875)
  Bottom Layer w0.2: v1(145.95,92) R12.1@147.375,92
  other v2: 58.592,97.814 61.132,97.814 101.592,97.814 104.132,97.814 144.592,97.814 147.132,97.814 59.862,99.084 102.862,99.084 145.862,99.084 58.592,100.354 61.132,100.354 101.592,100.354 104.132,100.354 144.592,100.354 147.132,100.354 23.868,114.646 26.408,114.646 66.868,114.646 69.408,114.646 109.868,114.646 112.408,114.646 25.138,115.916 68.138,115.916 111.138,115.916 23.868,117.186 26.408,117.186 66.868,117.186 69.408,117.186 109.868,117.186 112.408,117.186
  other v4: 48.178,104.291 50.718,104.291 53.258,104.291 55.798,104.291 58.338,104.291 60.878,104.291 91.178,104.291 93.718,104.291 96.258,104.291 98.798,104.291 101.338,104.291 103.878,104.291 134.178,104.291 136.718,104.291 139.258,104.291 141.798,104.291 144.338,104.291 146.878,104.291 22.825,106.875 24.04,106.875 25.255,106.875 26.471,106.875 24.122,110.709 26.662,110.709 29.202,110.709 31.742,110.709 34.282,110.709 36.822,110.709 67.122,110.709 69.662,110.709 72.202,110.709 74.742,110.709 77.282,110.709 79.822,110.709 110.122,110.709 112.662,110.709 115.202,110.709 117.742,110.709 120.282,110.709 122.822,110.709
NetC8_X+_2: C8_X+.2 R5_X+.2 R7_X+.1 U2_X+.3 | length 9.6
  Top Layer w0.4: C8_X+.2@74.414,84.413 76.904,84.413 R7_X+.1@76.954,84.463 R5_X+.2@79.494,84.463 80.764,85.733 U2_X+.3@80.764,88.389
NetC8_X-_2: C8_X-.2 R5_X-.2 R7_X-.1 U2_X-.3 | length 9.6
  Top Layer w0.4: U2_X-.3@90.236,126.611 90.236,129.267 R5_X-.2@91.506,130.537 R7_X-.1@94.046,130.537 94.096,130.587 C8_X-.2@96.586,130.587
NetC8_Y+_2: C8_Y+.2 R5_Y+.2 R7_Y+.1 U2_Y+.3 | length 9.6
  Top Layer w0.4: C8_Y+.2@117.414,84.413 119.904,84.413 R7_Y+.1@119.954,84.463 R5_Y+.2@122.494,84.463 123.764,85.733 U2_Y+.3@123.764,88.389
NetC8_Y-_2: C8_Y-.2 R5_Y-.2 R7_Y-.1 U2_Y-.3 | length 9.6
  Top Layer w0.4: U2_Y-.3@47.236,126.611 47.236,129.267 R5_Y-.2@48.506,130.537 R7_Y-.1@51.046,130.537 51.096,130.587 C8_Y-.2@53.586,130.587
NetC8_Z+_2: C8_Z+.2 R5_Z+.2 R7_Z+.1 U2_Z+.3 | length 9.6
  Top Layer w0.4: C8_Z+.2@31.414,84.413 33.904,84.413 R7_Z+.1@33.954,84.463 R5_Z+.2@36.494,84.463 37.764,85.733 U2_Z+.3@37.764,88.389
NetC8_Z-_2: C8_Z-.2 R5_Z-.2 R7_Z-.1 U2_Z-.3 | length 9.6
  Top Layer w0.4: U2_Z-.3@133.236,126.611 133.236,129.267 R5_Z-.2@134.506,130.537 R7_Z-.1@137.046,130.537 137.096,130.587 C8_Z-.2@139.586,130.587
NetC13_1: C13.1 U4.27 | length 4.4
  Top Layer w0.2: U4.27@172.625,136.4 172.675,136.35 173.8,136.35 174.125,136.025 C13.1@174.125,133.325
NetC14_2: C14.2 U4.26 | length 6.3
  Top Layer w0.2: U4.26@172.625,137.05 174.1,137.05 176.725,134.425 C14.2@176.725,133.325
NetC22_2: C22.2 U12.7 X1.1 | length 14.9
  Top Layer w0.2: U12.7@169.075,105.125 171.275,105.125 174.325,102.075 X1.1@174.325,98.375 174.35,98.35 C22.2@174.35,93.725
NetC23_2: C23.2 U12.8 X1.2 | length 11.6
  Top Layer w0.2: U12.8@169.075,105.925 173.95,105.925 174.325,106.3 X1.2@174.325,107.875 C23.2@174.325,112.525
NetC28_2: C28.2 R22.2 U14.7 U14.8 | length 5
  Top Layer w0.2: C28.2@173.35,122.025 173.725,122.4 U14.8@175.425,122.4 ; R22.2@175.25,124.575 175.425,124.4 U14.8@175.425,122.4 ; U14.7@175.925,122.4 U14.8@175.425,122.4
NetD1_X+_1: D1_X+.1 P1_X+.1 P1_X+.3 P1_X+.5 P1_X+.7 R2_X+.1 SOLAR_X+.1 | length 15.5
  Top Layer w0.4: v3(69.334,87.797) R2_X+.1@69.334,89.591
  Top Layer w0.8: D1_X+.1@89.374,74.335 D1_X+.1@89.404,74.305
  Top Layer w1.5: SOLAR_X+.1@79.494,69.239 79.494,72.739 81.06,74.305 D1_X+.1@84.824,74.305 ; D1_X+.1@84.824,74.335 D1_X+.1@89,74.335
NetD1_X+_2: D1_X+.2 R1_X+.2 U1_X+.4 | length 21.4
  Top Layer w0.4: U1_X+.4@98.499,69.813 99.764,69.813 100.222,70.271 R1_X+.2@101.338,70.271
  Top Layer w1.2: D1_X+.2@87.114,67.855 88.762,66.207 100.322,66.207 101.338,67.223 R1_X+.2@101.338,70.271
  other v2: 85.844,67.08 88.384,67.08 87.114,68.35 85.844,69.62 88.384,69.62
NetD1_X-_1: D1_X-.1 P1_X-.1 P1_X-.3 P1_X-.5 P1_X-.7 R2_X-.1 SOLAR_X-.1 | length 15.8
  Top Layer w0.4: R2_X-.1@101.666,125.409 v3(101.666,127.203)
  Top Layer w0.8: D1_X-.1@81.596,140.695 D1_X-.1@81.925,140.695
  Top Layer w1.5: D1_X-.1@81.955,140.665 D1_X-.1@86.176,140.665 ; D1_X-.1@86.176,140.695 89.94,140.695 91.506,142.261 SOLAR_X-.1@91.506,145.761
NetD1_X-_2: D1_X-.2 R1_X-.2 U1_X-.4 | length 21.4
  Top Layer w0.4: R1_X-.2@69.662,144.729 70.778,144.729 71.236,145.187 U1_X-.4@72.501,145.187
  Top Layer w1.2: R1_X-.2@69.662,144.729 69.662,147.777 70.678,148.793 82.238,148.793 D1_X-.2@83.886,147.145
  other v2: 82.616,145.38 85.156,145.38 83.886,146.65 82.616,147.92 85.156,147.92
NetD1_Y+_1: D1_Y+.1 P1_Y+.1 P1_Y+.3 P1_Y+.5 P1_Y+.7 R2_Y+.1 SOLAR_Y+.1 | length 15.5
  Top Layer w0.4: v3(112.334,87.797) R2_Y+.1@112.334,89.591
  Top Layer w0.8: D1_Y+.1@132.374,74.335 D1_Y+.1@132.404,74.305
  Top Layer w1.5: SOLAR_Y+.1@122.494,69.239 122.494,72.739 124.06,74.305 D1_Y+.1@127.824,74.305 ; D1_Y+.1@127.824,74.335 D1_Y+.1@132,74.335
NetD1_Y+_2: D1_Y+.2 R1_Y+.2 U1_Y+.4 | length 21.4
  Top Layer w0.4: U1_Y+.4@141.499,69.813 142.764,69.813 143.222,70.271 R1_Y+.2@144.338,70.271
  Top Layer w1.2: D1_Y+.2@130.114,67.855 131.762,66.207 143.322,66.207 144.338,67.223 R1_Y+.2@144.338,70.271
  other v2: 128.844,67.08 131.384,67.08 130.114,68.35 128.844,69.62 131.384,69.62
NetD1_Y-_1: D1_Y-.1 P1_Y-.1 P1_Y-.3 P1_Y-.5 P1_Y-.7 R2_Y-.1 SOLAR_Y-.1 | length 15.5
  Top Layer w0.4: R2_Y-.1@58.666,125.409 v3(58.666,127.203)
  Top Layer w0.8: D1_Y-.1@38.596,140.695 D1_Y-.1@38.626,140.665
  Top Layer w1.5: D1_Y-.1@39,140.695 D1_Y-.1@43.176,140.695 46.94,140.695 48.506,142.261 SOLAR_Y-.1@48.506,145.761
NetD1_Y-_2: D1_Y-.2 R1_Y-.2 U1_Y-.4 | length 21.4
  Top Layer w0.4: R1_Y-.2@26.662,144.729 27.778,144.729 28.236,145.187 U1_Y-.4@29.501,145.187
  Top Layer w1.2: R1_Y-.2@26.662,144.729 26.662,147.777 27.678,148.793 39.238,148.793 D1_Y-.2@40.886,147.145
  other v2: 39.616,145.38 42.156,145.38 40.886,146.65 39.616,147.92 42.156,147.92
NetD1_Z+_1: D1_Z+.1 P1_Z+.1 P1_Z+.3 P1_Z+.5 P1_Z+.7 R2_Z+.1 SOLAR_Z+.1 | length 15.5
  Top Layer w0.4: v3(26.334,87.797) R2_Z+.1@26.334,89.591
  Top Layer w0.8: D1_Z+.1@46.374,74.335 D1_Z+.1@46.404,74.305
  Top Layer w1.5: SOLAR_Z+.1@36.494,69.239 36.494,72.739 38.06,74.305 D1_Z+.1@41.824,74.305 ; D1_Z+.1@41.824,74.335 D1_Z+.1@46,74.335
NetD1_Z+_2: D1_Z+.2 R1_Z+.2 U1_Z+.4 | length 21.4
  Top Layer w0.4: U1_Z+.4@55.499,69.813 56.764,69.813 57.222,70.271 R1_Z+.2@58.338,70.271
  Top Layer w1.2: D1_Z+.2@44.114,67.855 45.762,66.207 57.322,66.207 58.338,67.223 R1_Z+.2@58.338,70.271
  other v2: 42.844,67.08 45.384,67.08 44.114,68.35 42.844,69.62 45.384,69.62
NetD1_Z-_1: D1_Z-.1 P1_Z-.1 P1_Z-.3 P1_Z-.5 P1_Z-.7 R2_Z-.1 SOLAR_Z-.1 | length 15.9
  Top Layer w0.4: R2_Z-.1@144.666,125.409 v3(144.666,127.203)
  Top Layer w0.8: D1_Z-.1@124.596,140.695 D1_Z-.1@124.875,140.695
  Top Layer w1.5: D1_Z-.1@124.875,140.695 124.905,140.665 D1_Z-.1@129.176,140.665 ; D1_Z-.1@129.176,140.695 132.94,140.695 134.506,142.261 SOLAR_Z-.1@134.506,145.761
NetD1_Z-_2: D1_Z-.2 R1_Z-.2 U1_Z-.4 | length 21.4
  Top Layer w0.4: R1_Z-.2@112.662,144.729 113.778,144.729 114.236,145.187 U1_Z-.4@115.501,145.187
  Top Layer w1.2: R1_Z-.2@112.662,144.729 112.662,147.777 113.678,148.793 125.238,148.793 D1_Z-.2@126.886,147.145
  other v2: 125.616,145.38 128.156,145.38 126.886,146.65 125.616,147.92 128.156,147.92
NetD3_1: D3.1 R27.2 | length 3.4
  Top Layer w0.2: v1(166.275,65) D3.1@168,65
  Bottom Layer w0.2: v1(166.275,65) R27.2@168,65
NetL1_X+_1: L1_X+.1 R5_X+.1 R6_X+.2 | length 21.7
  Top Layer w0.4: R5_X+.1@79.494,82.463 R6_X+.2@82.034,82.463
  Top Layer w0.8: R6_X+.2@82.034,82.463 82.034,78.907 83.977,76.964 L1_X+.1@96.79,76.964
NetL1_X-_1: L1_X-.1 R5_X-.1 R6_X-.2 | length 21.7
  Top Layer w0.4: R6_X-.2@88.966,132.537 R5_X-.1@91.506,132.537
  Top Layer w0.8: L1_X-.1@74.21,138.036 87.023,138.036 88.966,136.093 R6_X-.2@88.966,132.537
NetL1_Y+_1: L1_Y+.1 R5_Y+.1 R6_Y+.2 | length 21.7
  Top Layer w0.4: R5_Y+.1@122.494,82.463 R6_Y+.2@125.034,82.463
  Top Layer w0.8: R6_Y+.2@125.034,82.463 125.034,78.907 126.977,76.964 L1_Y+.1@139.79,76.964
NetL1_Y-_1: L1_Y-.1 R5_Y-.1 R6_Y-.2 | length 21.7
  Top Layer w0.4: R6_Y-.2@45.966,132.537 R5_Y-.1@48.506,132.537
  Top Layer w0.8: L1_Y-.1@31.21,138.036 44.023,138.036 45.966,136.093 R6_Y-.2@45.966,132.537
NetL1_Z+_1: L1_Z+.1 R5_Z+.1 R6_Z+.2 | length 21.7
  Top Layer w0.4: R5_Z+.1@36.494,82.463 R6_Z+.2@39.034,82.463
  Top Layer w0.8: R6_Z+.2@39.034,82.463 39.034,78.907 40.977,76.964 L1_Z+.1@53.79,76.964
NetL1_Z-_1: L1_Z-.1 R5_Z-.1 R6_Z-.2 | length 21.7
  Top Layer w0.4: R6_Z-.2@131.966,132.537 R5_Z-.1@134.506,132.537
  Top Layer w0.8: L1_Z-.1@117.21,138.036 130.023,138.036 131.966,136.093 R6_Z-.2@131.966,132.537
NetQ1_X+_1: Q1_X+.3 U2_X+.6 | length 9.2
  Top Layer w0.4: v3(84.574,86.146) U2_X+.6@84.574,88.389
  Bottom Layer w0.4: v3(84.574,86.146) 87.496,86.146 88.993,87.643 Q1_X+.3@88.993,89.603
NetQ1_X-_1: Q1_X-.3 U2_X-.6 | length 9.2
  Top Layer w0.4: U2_X-.6@86.426,126.611 v3(86.426,128.854)
  Bottom Layer w0.4: Q1_X-.3@82.007,125.397 82.007,127.357 83.504,128.854 v3(86.426,128.854)
NetQ1_Y+_1: Q1_Y+.3 U2_Y+.6 | length 9.2
  Top Layer w0.4: v3(127.574,86.146) U2_Y+.6@127.574,88.389
  Bottom Layer w0.4: v3(127.574,86.146) 130.496,86.146 131.993,87.643 Q1_Y+.3@131.993,89.603
NetQ1_Y-_1: Q1_Y-.3 U2_Y-.6 | length 9.2
  Top Layer w0.4: U2_Y-.6@43.426,126.611 v3(43.426,128.854)
  Bottom Layer w0.4: Q1_Y-.3@39.007,125.397 39.007,127.357 40.504,128.854 v3(43.426,128.854)
NetQ1_Z+_1: Q1_Z+.3 U2_Z+.6 | length 9.2
  Top Layer w0.4: v3(41.574,86.146) U2_Z+.6@41.574,88.389
  Bottom Layer w0.4: v3(41.574,86.146) 44.496,86.146 45.993,87.643 Q1_Z+.3@45.993,89.603
NetQ1_Z-_1: Q1_Z-.3 U2_Z-.6 | length 9.2
  Top Layer w0.4: U2_Z-.6@129.426,126.611 v3(129.426,128.854)
  Bottom Layer w0.4: Q1_Z-.3@125.007,125.397 125.007,127.357 126.504,128.854 v3(129.426,128.854)
NetR4_X+_1: R4_X+.1 U2_X+.1 | length 5
  Top Layer w0.4: R4_X+.1@74.414,89.591 78.224,89.591 U2_X+.1@78.224,88.389
NetR4_X-_1: R4_X-.1 U2_X-.1 | length 5
  Top Layer w0.4: U2_X-.1@92.776,126.611 92.776,125.409 R4_X-.1@96.586,125.409
NetR4_Y+_1: R4_Y+.1 U2_Y+.1 | length 5
  Top Layer w0.4: R4_Y+.1@117.414,89.591 121.224,89.591 U2_Y+.1@121.224,88.389
NetR4_Y-_1: R4_Y-.1 U2_Y-.1 | length 5
  Top Layer w0.4: U2_Y-.1@49.776,126.611 49.776,125.409 R4_Y-.1@53.586,125.409
NetR4_Z+_1: R4_Z+.1 U2_Z+.1 | length 5
  Top Layer w0.4: R4_Z+.1@31.414,89.591 35.224,89.591 U2_Z+.1@35.224,88.389
NetR4_Z-_1: R4_Z-.1 U2_Z-.1 | length 5
  Top Layer w0.4: U2_Z-.1@135.776,126.611 135.776,125.409 R4_Z-.1@139.586,125.409
NetR25_B_2: R25_B.2 U13_B.9 | length 3.8
  Top Layer w0.2: v1(163.75,134.9) U13_B.9@165.1,134.9 ; U13_B.9@165.075,134.95 R25_B.2@167.125,134.95
  Top Layer w0.5: R25_B.2@167.125,134.95 R25_B.2@167.375,134.7
NetU13_B_8: U13_B.8